# Altium PCB Layout.PcbDoc
Units mm, origin at the board's own origin, x right, y up, seen from the top; angles counter-clockwise.
Board outline 30.4 x 66 mm, 4 copper layers (Top Layer, Ground Layer, Power Layer, Bottom Layer), stack 1.591 mm thick; 36 components, 26 nets, 122 pads, 64 vias.
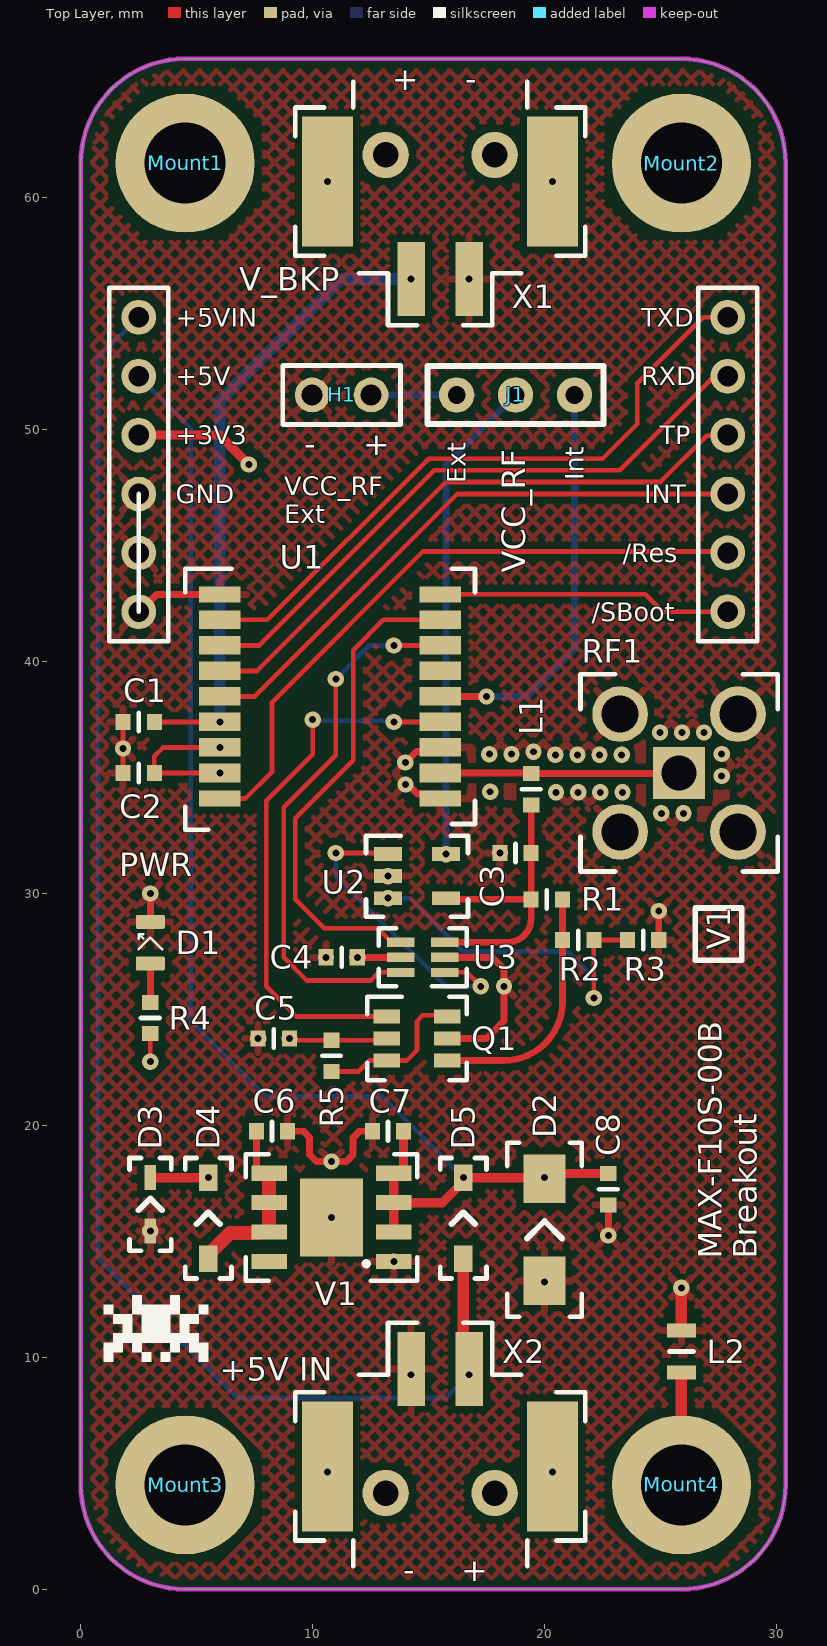
[diagram p0: Top Layer view]
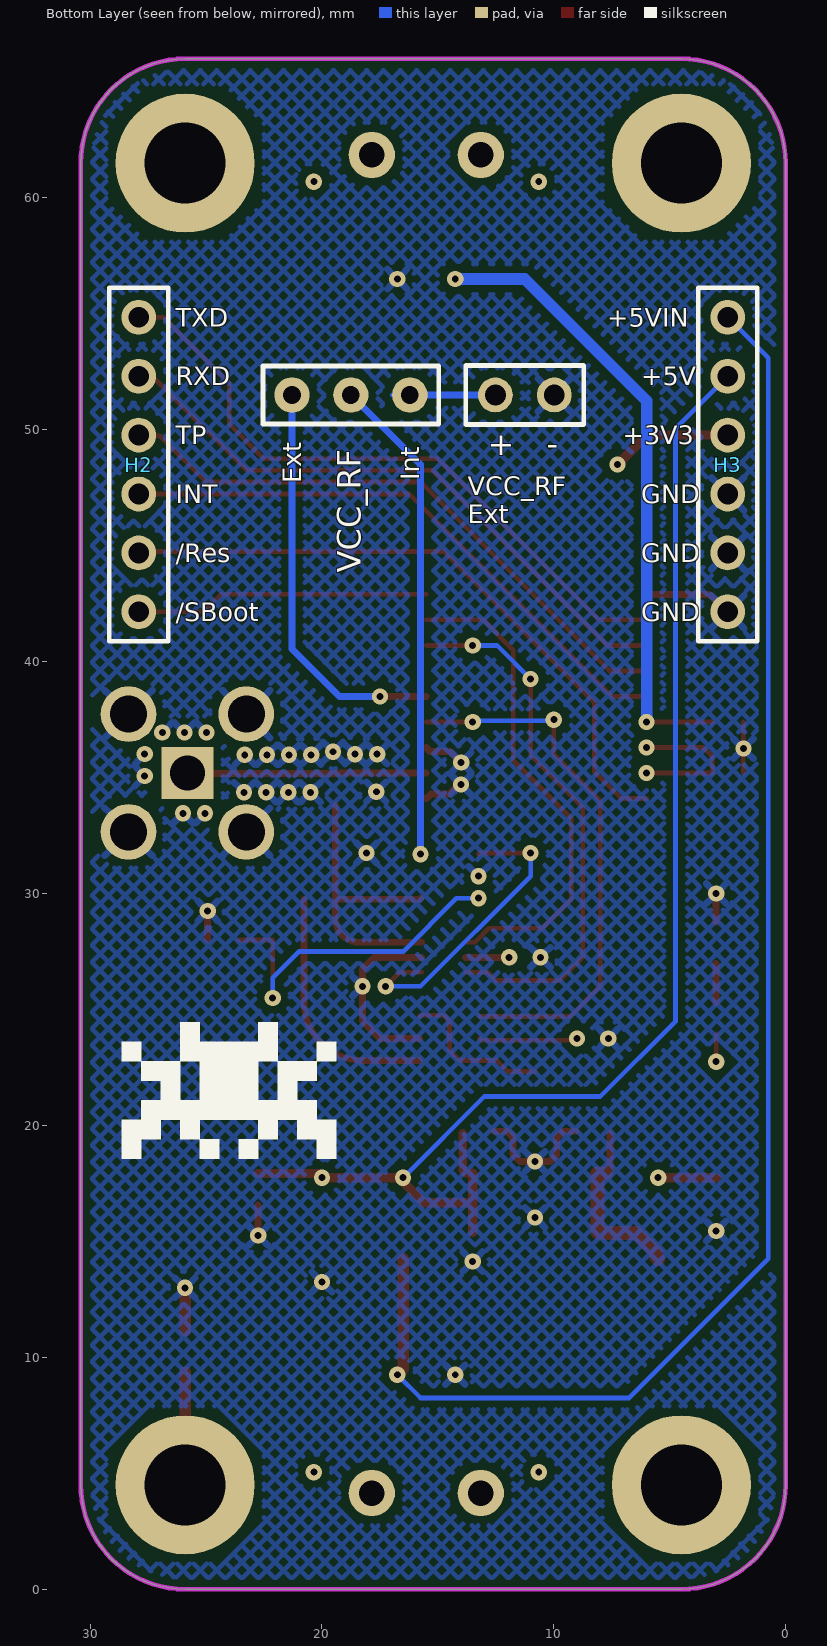
[diagram p1: Bottom Layer view, seen from below]
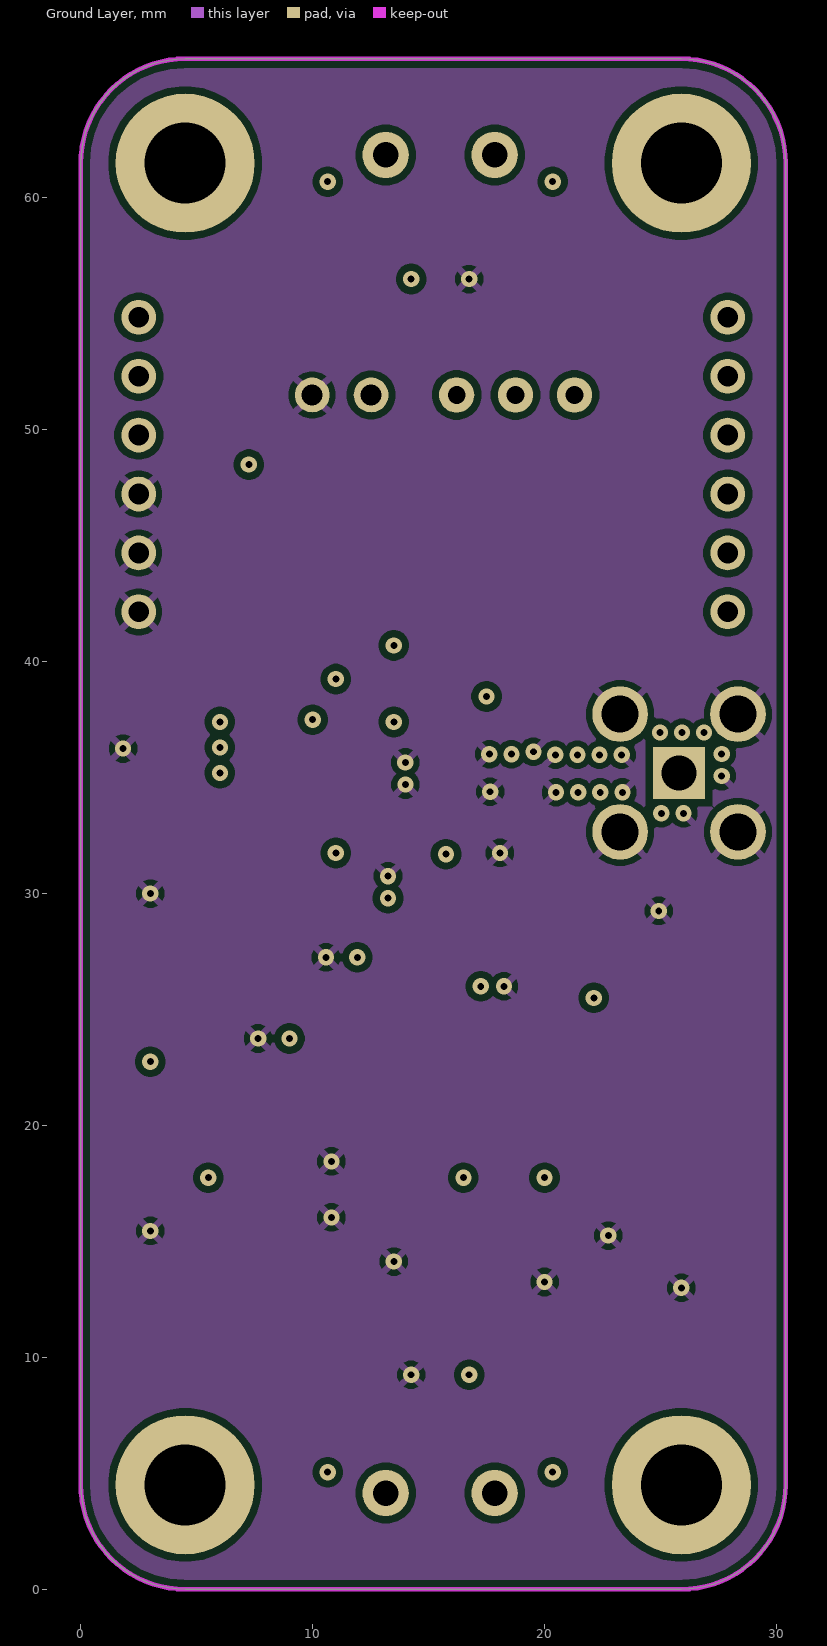
[diagram p2: Ground Layer]
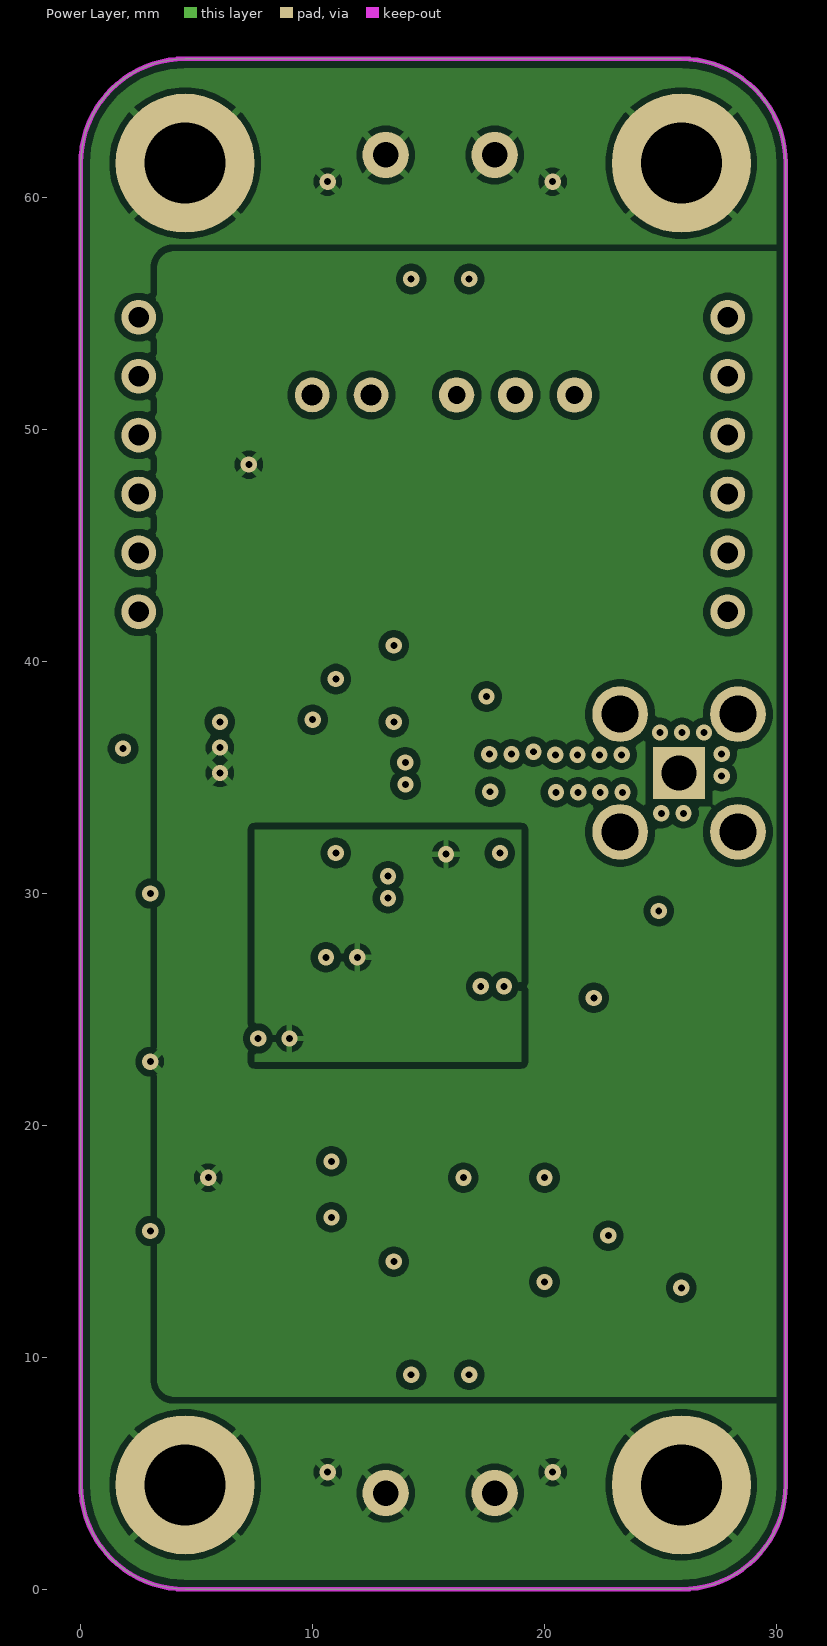
[diagram p3: Power Layer]
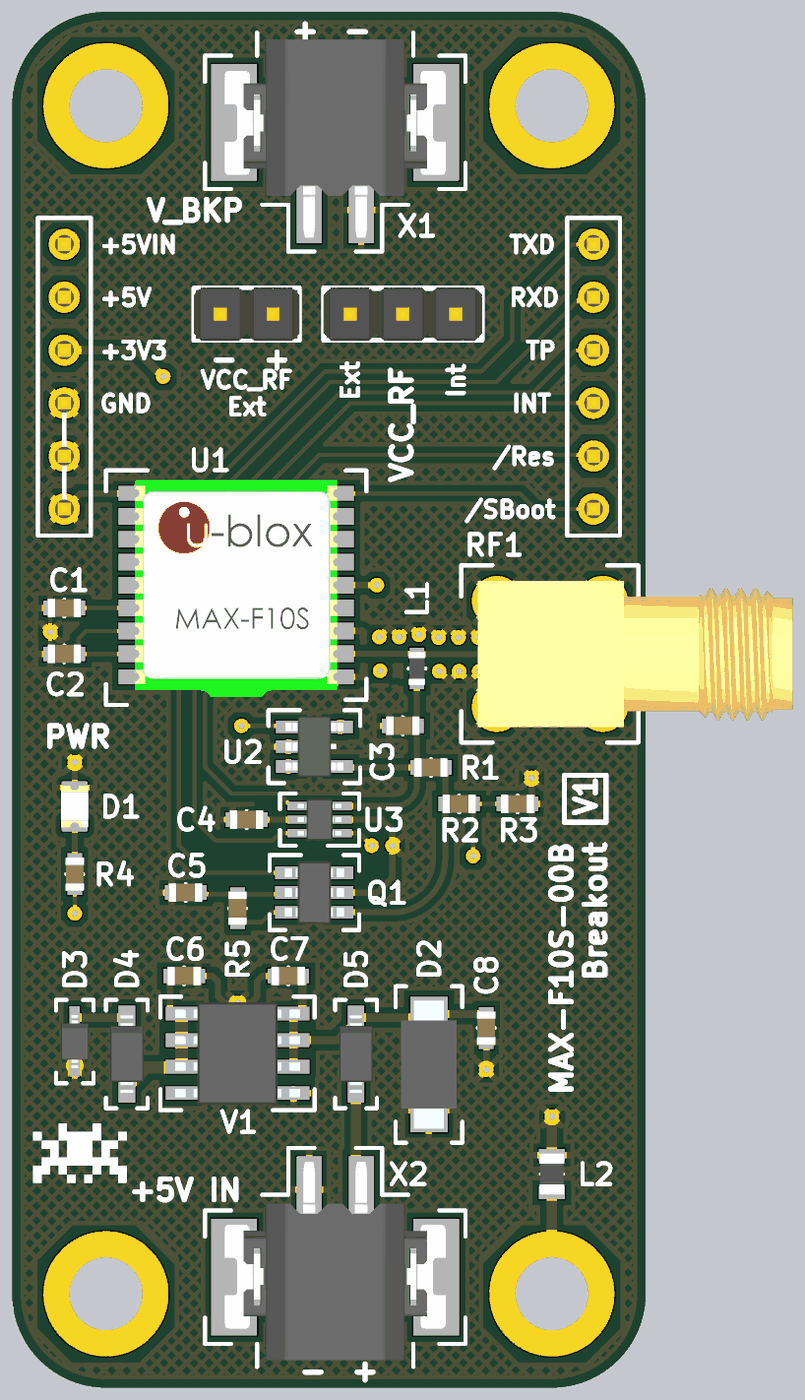
[diagram p4: 3D render of the assembled board from above, using the file's embedded part models]

## Layer stack, top to bottom
Top Solder: solder mask 0.0102, Solder Resist, Dk 3.8
Top Layer: signal copper 0.035
Dielectric 2: prepreg 0.2104, 7628*1, Dk 4.4
Ground Layer: signal copper 0.0175
Dielectric 1: dielectric 1.065, FR-4, Dk 4.8
Power Layer: signal copper 0.0175
Dielectric 3: prepreg 0.2104, 7628*1, Dk 4.4
Bottom Layer: signal copper 0.035
Bottom Solder: solder mask 0.0102, Solder Resist, Dk 3.8

## Board outline
0,4.5 0,61.5 cw(c4.5,61.5) 4.5,66 25.9,66 cw(c25.9,61.5) 30.4,61.5 30.4,4.5 cw(c25.9,4.5) 25.9,0 4.5,0 cw(c4.5,4.5)

## Design rules (kind name [scope] priority, off if disabled: settings)
BoardOutlineClearance [All] p1: gap=0.2 ignorepadtopadclearanceinfootprint=FALSE
Clearance "inPolygon Clearance" [InPolygon] p1: gap=0.3 ignorepadtopadclearanceinfootprint=TRUE // this rule ensures that every net within a polygon of a different net has a set clearance from the poly
Clearance "High Current Polygon Clearance" [(InPolygon AND InNetClass('High_Current_Nets'))] p2: gap=0 ignorepadtopadclearanceinfootprint=TRUE // this rule ensures that every net within a polygon of a different net has a set clearance from the poly
Clearance "Different Diff Pair" [All] p3: gap=0.2 ignorepadtopadclearanceinfootprint=TRUE
Clearance "Same Diff Pair" [All] p4: gap=0.1 ignorepadtopadclearanceinfootprint=TRUE
Clearance "Different Nets" [not InAnyDifferentialPair] p5: gap=0.3 ignorepadtopadclearanceinfootprint=TRUE except(0.1: Arc-SMDPad Arc-THPad Arc-Via Arc-Text Track-SMDPad Track-THPad Track-Via Track-Text SMDPad-Text THPad-Text Via-Text Fill-Text Poly-Text Region-Text Text-Text; 0.12: Arc-Arc Arc-Track Track-Track; 0.15: SMDPad-SMDPad SMDPad-THPad SMDPad-Via THPad-THPad THPad-Via Via-Via; 0.2: Arc-Hole Track-Hole SMDPad-Hole THPad-Hole Via-Hole Fill-Hole Poly-Hole Region-Hole Text-Hole)
Clearance "Same Net" [not InAnyDifferentialPair] p6: gap=0 ignorepadtopadclearanceinfootprint=TRUE except(0.1: THPad-Via; 0.18: Arc-Arc Arc-Track Track-Track)
ComponentClearance [All] p1: gap=0.102 collisioncheckmode=3 verticalgap=0.102 showdistances=TRUE
DiffPairsRouting "Ethernet Routing" [InDifferentialPairClass('Ethernet_Pairs')] p1: maxlimit=0.25 minlimit=0.2 mostfreqgap=0.25 toplayer_maxgap=0.2 toplayer_prefgap=0.2 toplayer_minwidth=0.25 toplayer_maxwidth=0.25 toplayer_prefwidth=0.25 midlayer1_mingap=0.25 midlayer1_minwidth=0.19 midlayer1_maxwidth=0.19 midlayer1_prefwidth=0.19 midlayer2_mingap=0.25 midlayer2_minwidth=0.19 midlayer2_maxwidth=0.19 midlayer2_prefwidth=0.19 bottomlayer_maxgap=0.2 bottomlayer_prefgap=0.2 bottomlayer_minwidth=0.25 bottomlayer_maxwidth=0.25 bottomlayer_prefwidth=0.25 impedanceprofiledriven=TRUE maxuncoupledlength=12.7
DiffPairsRouting "USB Routing" [InDifferentialPairClass('USB_Pairs')] p2: maxlimit=0.291 minlimit=0.127 mostfreqgap=0.291 toplayer_maxgap=0.127 toplayer_prefgap=0.127 toplayer_minwidth=0.23 toplayer_maxwidth=0.23 toplayer_prefwidth=0.23 midlayer1_mingap=0.291 midlayer1_minwidth=0.25 midlayer1_maxwidth=0.25 midlayer1_prefwidth=0.25 midlayer2_mingap=0.291 midlayer2_minwidth=0.25 midlayer2_maxwidth=0.25 midlayer2_prefwidth=0.25 bottomlayer_maxgap=0.127 bottomlayer_prefgap=0.127 bottomlayer_minwidth=0.23 bottomlayer_maxwidth=0.23 bottomlayer_prefwidth=0.23 maxuncoupledlength=12.7
DiffPairsRouting "CAN Routing" [InDifferentialPairClass('CAN_Pairs')] p3: maxlimit=0.907 minlimit=0.5 mostfreqgap=0.907 toplayer_maxgap=0.5 toplayer_prefgap=0.5 toplayer_minwidth=0.201 toplayer_maxwidth=0.201 toplayer_prefwidth=0.201 midlayer1_mingap=0.907 midlayer1_minwidth=0.155 midlayer1_maxwidth=0.155 midlayer1_prefwidth=0.155 midlayer2_mingap=0.907 midlayer2_minwidth=0.155 midlayer2_maxwidth=0.155 midlayer2_prefwidth=0.155 bottomlayer_maxgap=0.5 bottomlayer_prefgap=0.5 bottomlayer_minwidth=0.201 bottomlayer_maxwidth=0.201 bottomlayer_prefwidth=0.201 impedanceprofiledriven=TRUE maxuncoupledlength=12.7
Height [All] p1: minheight=0 maxheight=1816.048 prefheight=12.7
HoleSize [All] p1: absolutevalues=TRUE maxlimit=6.3 minlimit=0.3 maxpercent=80.000 minpercent=20.000
HoleToHoleClearance [All] p1: gap=0.25 allowstackedmicrovias=FALSE
MatchedLengths "XTAL Nets Matched Delays" [InNetClass('XTAL_Nets')] p1: tolerance=25.4 checknetsindiffpair=FALSE checkdiffpairvsdiffpair=TRUE checkxsignals=TRUE checkothers=TRUE usedelayunits=TRUE delaytolerance=10.000000
MatchedLengths "Diff Pair Matched Delays" [InDifferentialPairClass('Ethernet_Pairs') or InDifferentialPairClass('USB_Pairs') or InDifferentialPairClass('CAN_Pairs')] p2: tolerance=5 checknetsindiffpair=TRUE checkdiffpairvsdiffpair=FALSE checkxsignals=FALSE checkothers=FALSE usedelayunits=TRUE delaytolerance=100.000000 phasematching=TRUE phasedelaytolerance=5.000000 phasedistance=12.7
MinimumAnnularRing [All] p1: minimumring=0.2
MinimumSolderMaskSliver [All] p1: minsoldermaskwidth=0
PlaneClearance "Supply Net Clearance" [InNetClass('Supply_Nets')] p1: clearance=0.5
PlaneClearance "All Nets" [All] p2: clearance=0.3
PolygonConnect "High Current" [InNetClass('High_Current_Nets')] p1: thpad.connectstyle=Relief thpad.reliefconductorwidth=0.4 thpad.reliefentries=4 thpad.polygonreliefangle="90 Angle" thpad.airgapwidth=0.1 thpad.conductorbypadedge=TRUE thpad.mindistance=0.381 thpad.enablemindistance=FALSE smdpad.connectstyle=Direct smdpad.reliefconductorwidth=0.254 smdpad.reliefentries=4 smdpad.polygonreliefangle="90 Angle" smdpad.airgapwidth=0.254 via.connectstyle=Direct via.reliefconductorwidth=0.254 via.reliefentries=4 via.polygonreliefangle="90 Angle" via.airgapwidth=0.254
PolygonConnect "Supply Nets" [InNetClass('Supply_Nets')] p2: connectstyle=Relief reliefconductorwidth=0.3 reliefentries=4 polygonreliefangle="90 Angle" conductorbypadedge=TRUE mindistance=0.381 enablemindistance=FALSE airgapwidth=0.254
PolygonConnect General [All] p3: connectstyle=Relief reliefconductorwidth=0.254 reliefentries=4 polygonreliefangle="90 Angle" airgapwidth=0.254
RoutingVias [All] p1: holewidth=0.2 width=0.35 viastyle="Through Hole" minholewidth=0.15 minwidth=0.3 maxholewidth=6.3 maxwidth=6.55
SilkToSilkClearance [All] p1: silktosilkclearance=0
SilkToSolderMaskClearance [All] p1: minsilkscreentomaskgap=0 clearancetoexposedcopper=TRUE
SolderMaskExpansion [All] p1: expansion=0.075 istentingtop=FALSE
SupplyNets "Schematic Supply Nets_6" [InNet('+5V_IN')] p1: voltage=0.000
SupplyNets "Schematic Supply Nets_5" [InNet('+3V3')] p2: voltage=0.000
SupplyNets "Schematic Supply Nets_4" [InNet('RF_IN')] p3: voltage=0.000
SupplyNets "Schematic Supply Nets_2" [InNet('+5V')] p4: voltage=0.000
SupplyNets "Schematic Supply Nets" [InNet('VCC_RF')] p5: voltage=0.000
SupplyNets "Schematic Supply Nets_3" [InNet('GND')] p6: voltage=0.000
SupplyNets "Schematic Supply Nets_1" [InNet('Earth')] p7: voltage=0.000
UnRoutedNet [All] p1: checkbadconnections=TRUE
Width "nRF Width" [InNetClass('nRF Signal')] p1: maxlimit=0.286 minlimit=0.171 preferedwidth=0.286 toplayer_minwidth=0.286 midlayer1_maxwidth=0.171 midlayer1_prefwidth=0.171 midlayer2_maxwidth=0.171 midlayer2_prefwidth=0.171 bottomlayer_minwidth=0.286 impedanceprofiledriven=TRUE impedanceprofileid={6C787CD7-8D92-4465-8A2E-18DFF36EB818} impedanceprofilevalue=50.000000 minimp=50.000000 maximp=50.000000 favimp=50.000000 checkconnectedcopper=TRUE
Width [All] p2: maxlimit=100 minlimit=0.1 preferedwidth=0.2
20 further rules are at their usual default settings.

## Classes and differential pairs
net class "nRF Signal": NetC3_2 NetQ1_4 RF_IN
net class Supply_Nets: +3V3 +5V +5V_IN Earth GND NetC6_2
component class Power: C6 C7 C8 D1 D2 D3 D4 D5 R4 V1
component class Main: C1 C2 J1 U1
component class Connections: H1 H2 H3 L2 Mount1 Mount2 Mount3 Mount4 RF1 X1 X2
component class "Antenna Supervisory Circuit": C3 C4 C5 L1 Q1 R1 R2 R3 R5 U2 U3

## Components (designator, comment, footprint, x,y, rotation, side; value= is the part's Value field where it differs from the comment)
C1 "[Cap] 0603 0.1uF 10% 50V" "[Cap] SMD 0603" 2.5,37.4 r0 top (schematic designator C8)
C2 "[Cap] 0603 0.1uF 10% 50V" "[Cap] SMD 0603" 2.5,35.2 r0 top (schematic designator C7)
C3 "[Cap] 0603 0.01uF 10% 50V" "[Cap] SMD 0603" 18.75,31.75 r0 top (schematic designator C1)
C4 "[Cap] 0603 0.1uF 10% 50V" "[Cap] SMD 0603" 11.25,27.25 r0 top (schematic designator C2)
C5 "[Cap] 0603 0.1uF 10% 50V" "[Cap] SMD 0603" 8.325,23.75 r0 top (schematic designator C3)
C6 "[Cap] 0603 10uF 10% 10V" "[Cap] SMD 0603" 8.25,19.75 r180 top
C7 "[Cap] 0603 10uF 10% 10V" "[Cap] SMD 0603" 13.25,19.75 r0 top (schematic designator C5)
C8 "[Cap] 0603 0.1uF 10% 50V" "[Cap] SMD 0603" 22.75,17.25 r90 top (schematic designator C4)
D1 "[LED] SMD 0805 Green" "[LED] SMD 0805" 3,27.882 r90 top (schematic designator D5)
D2 "DO-214AC" "[Diode] SMD DO-214AC" 20,15.5 r90 top
D3 "SOD-323" "[Diode] SOD-323" 3,16.6 r90 top (schematic designator D4)
D4 "SOD123" "[Diode] SMD SOD-123" 5.5,16 r90 top (schematic designator D3)
D5 "SOD123" "[Diode] SMD SOD-123" 16.5,16 r90 top (schematic designator D1)
H1 "1x2 Header" "[Header] 1x2 Male" 11.25,51.5 r180 top
H2 "1x6 Header" "[Header] 1x6 Male" 27.9,48.5 r270 bottom (schematic designator H5)
H3 "1x6 Header" "[Header] 1x6 Male" 2.5,48.5 r270 bottom (schematic designator H4)
J1 "[Jumper] Thru-Hole 3pin" "[Jumper] Thru-Hole 3pin" 18.75,51.5 r180 top
L1 "[47nH] SMD 0603 90mA" "[Inductor] SMD 0603" 19.425,34.5 r270 top
L2 "652-MH2029-300Y" "[Ferrite] SMD 0805" 25.9,10.25 r90 top
Mount1 "M3 Mount Hole" "[Mount] M3 Mount Hole" 4.5,61.5 r0 top
Mount2 "M3 Mount Hole" "[Mount] M3 Mount Hole" 25.9,61.5 r0 top
Mount3 "M3 Mount Hole" "[Mount] M3 Mount Hole" 4.5,4.5 r0 top
Mount4 "M3 Mount Hole" "[Mount] M3 Mount Hole" 25.9,4.5 r0 top
Q1 "N/PMOS" SOT-26 14.5,23.75 r0 top
R1 "[10] SMD 0603 5% 1/10W" "[Res] SMD 0603" 20.1,29.75 r180 top
R2 "[560] SMD 0603 5% 1/10W" "[Res] SMD 0603" 21.45,28 r180 top (schematic designator R3)
R3 "[100k] SMD 0603 1% 1/10W" "[Res] SMD 0603" 24.25,28 r180 top (schematic designator R4)
R4 "[220] SMD 0603 5% 1/10W" "[Res] SMD 0603" 3,24.632 r90 top (schematic designator R5)
R5 "[100k] SMD 0603 1% 1/10W" "[Res] SMD 0603" 10.812,23 r270 top (schematic designator R2)
RF1 "[SMA] 90deg Thru-Hole" "[SMA] 90deg Thru-Hole" 25.8,35.2 r180 top
U1 "Dual-Band GNSS Module" "[GNSS] MAX-F10S-00B" 10.75,38.5 r0 top
U2 "[Op-Amp] Rail-to-Rail Vmax=16V GBP=3kHz" "[Op-Amp] Rail-to-Rail Vmax=16V GBP=3kHz" 14.5,30.75 r0 top
U3 "[Buffer] Dual Open Drain" "[Buffer] Dual Open Drain" 14.75,27.25 r180 top
V1 "3V3 1.5A" "[Linear] 3V3 1.5A" 10.812,16.035 r180 top
X1 "[Pheonix] 2pin 2.5mm pitch" "[Pheonix] 2pin 2.5mm pitch" 15.5,56.5 r180 top (schematic designator X2)
X2 "[Pheonix] 2pin 2.5mm pitch" "[Pheonix] 2pin 2.5mm pitch" 15.5,9.5 r0 top (schematic designator X1)

## Footprints (in the part's own frame and the unit in brackets; to place one, negate y for a bottom-side part, rotate by r counter-clockwise, add the part's x,y. Pads: shape width x height; smd on the part's side, far side on the other; paste and mask are expansions set on the pad)
"[Buffer] Dual Open Drain" [mm] "NC7WZ07P6X"
  rect 1.2x0.4 smd: 1(-0.95,0.65) 2(-0.95,0) 3(-0.95,-0.65) 4(0.95,-0.65) 5(0.95,0) 6(0.95,0.65)
  silkscreen extent -1.9,-1.25 1.9,1.25, body extent -1.05,-1 1.05,1, height 1.1
"[Cap] SMD 0603" [mm]
  rect 0.65x0.7 smd: 1(-0.675,0) 2(0.675,0)
  silkscreen extent 0,-0.4 0,0.4, body extent -0.8,-0.45 0.8,0.45, height 0.8
"[Diode] SMD DO-214AC" [mm]
  rect 2.1x1.8 smd: 1(2.2,0) 2(-2.2,0)
  silkscreen extent -3.75,-1.6 3.75,1.6, body extent -3.07,-1.33 3.07,1.33, height 2.39
"[Diode] SMD SOD-123" [mm]
  rect 1.15x0.8 smd: 1(1.75,0) 2(-1.75,0)
  silkscreen extent -2.6,-1 2.6,1, body extent -1.85,-0.8 1.86,0.8, height 1.35
"[Diode] SOD-323" [mm]
  rect 1.075x0.5 smd: 1(1.15,0) 2(-1.15,0)
  silkscreen extent -2,-0.9 2,0.9, body extent -1.27,-0.65 1.27,0.65, height 1.14
"[Ferrite] SMD 0805" [mm]
  rect 0.6x1.25 smd: 1(-0.9,0) 2(0.9,0)
  silkscreen extent 0,-0.53 0,0.53, body extent -1,-0.6 1,0.6, height 1.1
"[GNSS] MAX-F10S-00B" [mm] "MAX-F10S-00B"
  rect 1.8x0.7 smd: 1(-4.75,4.4) 9(-4.75,-4.4) 10(4.75,-4.4) 18(4.75,4.4)
  rect 1.8x0.8 smd: 2(-4.75,3.3) 3(-4.75,2.2) 4(-4.75,1.1) 5(-4.75,0) 6(-4.75,-1.1) 7(-4.75,-2.2) 8(-4.75,-3.3) 11(4.75,-3.3) 12(4.75,-2.2) 13(4.75,-1.1) 14(4.75,0) 15(4.75,1.1) 16(4.75,2.2) 17(4.75,3.3)
  silkscreen extent -6.25,-5.75 6.25,5.5, body extent -4.85,-5.35 4.85,5.05, height 2.48
"[Header] 1x2 Male" [mm]
  round 1.5 hole 0.9: 1(-1.27,0) 2(1.27,0)
  silkscreen extent -2.54,-1.27 2.54,1.27, body extent -2.54,-1.27 2.54,1.27, height 9.5
"[Header] 1x6 Male" [mm]
  round 1.5 hole 0.9: 1(-6.35,0) 2(-3.81,0) 3(-1.27,0) 4(1.27,0) 5(3.81,0) 6(6.35,0)
  silkscreen extent -7.62,-1.27 7.62,1.27, body extent -7.62,-1.27 7.62,1.27, height 9.5
"[Inductor] SMD 0603" [mm]
  rect 0.65x0.7 smd: 1(-0.675,0) 2(0.675,0)
  silkscreen extent 0,-0.4 0,0.4, body extent -0.8,-0.4 0.8,0.4, height 0.95
"[Jumper] Thru-Hole 3pin" [mil]
  round 60 hole 30: 1(-100,0) 2(0,0) 3(100,0)
  silkscreen extent -149,-49 149,49, body extent -150,-50 150,50, height 374
"[LED] SMD 0805" [mm]
  rrect20% 0.6x1.25 smd: 1(-0.9,0) 2(0.9,0)
  silkscreen extent -0.28,-0.51 0.37,0.51, body extent -1,-0.65 1,0.65, height 0.8
"[Linear] 3V3 1.5A" [mm]
  rect 1.525x0.65 smd: 1(-2.688,1.905) 2(-2.688,0.635) 3(-2.688,-0.635) 4(-2.688,-1.905) 5(2.688,-1.905) 6(2.688,-0.635) 7(2.688,0.635) 8(2.688,1.905)
  rect 2.71x3.35 smd: 9(0,0)
  silkscreen extent -3.7,-2.73 3.7,2.73, body extent -3,-2.45 3,2.45, height 1.5
"[Mount] M3 Mount Hole" [mm]
  round 6 hole 3.5: 1(0,0)
"[Op-Amp] Rail-to-Rail Vmax=16V GBP=3kHz" [mm] "LT6003CS5#TRMPBF"
  rect 1.2x0.6 smd: 1(-1.25,0.95) 2(-1.25,0) 3(-1.25,-0.95) 4(1.25,-0.95) 5(1.25,0.95)
  silkscreen extent -2.2,-1.75 2.2,1.75, body extent -1.4,-1.45 1.4,1.45, height 1.2
"[Pheonix] 2pin 2.5mm pitch" [mm] "1778764"
  rect 1.2x3.2 smd: 1(-1.25,0) 2(1.25,0)
  rect 2.2x5.6 smd: MP(-4.85,-4.2) MP(4.85,-4.2)
  round 2 hole 1.1: MP(-2.35,-5.35) MP(2.35,-5.35)
  silkscreen extent -6.25,-8.5 6.25,2, body extent -5.3,-8.18 5.3,1.32, height 5
"[Res] SMD 0603" [mm]
  rect 0.65x0.7 smd: 1(-0.675,0) 2(0.675,0)
  silkscreen extent 0,-0.4 0,0.4, body extent -0.8,-0.45 0.8,0.45, height 0.8
"[SMA] 90deg Thru-Hole" [mm] "RFPC-SMA27-F"
  rect 2.25x2.25 hole 1.5: 1(0,0)
  round 2.4 hole 1.6: 2(-2.54,2.54) 2(-2.54,-2.54) 2(2.54,2.54) 2(2.54,-2.54)
  silkscreen extent -4.25,-4.25 4.25,4.25, body extent -11.65,-3.5 3.45,3.5, height 10.28
SOT-26 [mm]
  rect 1.15x0.6 smd: 1(-1.3,0.95) 2(-1.3,0) 3(-1.3,-0.95) 4(1.3,-0.95) 5(1.3,0) 6(1.3,0.95)
  silkscreen extent -2.15,-1.8 2.15,1.8, body extent -1.43,-1.5 1.43,1.5, height 1.4

## Part data
C1 C2 C4 C5 C8: "CL10B104KB8NNNC", Capacitance=100nF, Max Voltage=50V, Size Package=0603, Supplier Part Number 1=1276-1000-6-ND, Tolerance=10%, Supplier 1=DigiKey
C3: "C0603C103K5RACTU", Capacitance=10nF, Max Voltage=50V, Size Package=0603, Supplier Part Number 1=399-C0603C103K5RACTUDKR-ND, Tolerance=10%, Supplier 1=DigiKey
C6 C7: "CL10A106KP8NNNC", Capacitance=10uF, Max Voltage=10V, Size Package=0603, Supplier Part Number 1=1276-1192-6-ND, Tolerance=10%, Supplier 1=DigiKey
D1: "LG R971-KN-1-0-20-R18", Color=Green, Size Package=0805, Supplier Part Number 1=475-LGR971-KN-1CT-ND, Supplier 1=DigiKey
D2: library part "[Zener] SMD 5.6V 1W 5%", "SMAZ5V6-13-F", Optimal Zener Voltage=5.6V, Supplier Part Number 1=SMAZ5V6-FDICT-ND, Tolerance=5%, Supplier 1=DigiKey, Wattage=1W
D3: library part "[TVS] 3.3Vnom 19Vclamp_max", "CDSOD323-T03C", Optimal Zener Voltage=4V, Supplier Part Number 1=CDSOD323-T03CDKR-ND, Supplier 1=DigiKey, Wattage=350W
D4 D5: library part "[Schottky] SMD 40V 1A", "B5819W-TP", Supplier Part Number 1=B5819W-TPMSCT-ND, Supplier 1=DigiKey
H1: library part "[Header] 1x2 Male", "2.54mm pitch"
H2 H3: library part "[Header] 1x6 Male", "2.54mm pitch"
L1: "AIMC-0603-47NJ-T", Inductance=47nH, Package=0603, Supplier Part Number 1=535-11541-6-ND, Supplier 1=DigiKey
L2: library part "[Ferrite] SMD 0805 3A 30ohm", Res @ Freq="30 @ 100MHz", Size Package=0805, Supplier Part Number 1=MH2029-300YCT-ND, Supplier 1=DigiKey
Mount1 Mount2 Mount3 Mount4: library part "[Mount] M3 Mount Hole", "Place at least 4.5mm from board edge. Plated."
Q1: library part "[NMOS, PMOS] FET Array 20V 1.14A", "DMC2700UDM-7", Supplier Part Number 1=DMC2700UDM-7DKR-ND, Supplier 1=DigiKey
R1: "RC0603JR-1310RL", Resistance=10, Size Package=0603, Supplier Part Number 1=13-RC0603JR-1310RLDKR-ND, Tolerance=5%, Supplier 1=DigiKey, Wattage=1/10W
R2: "RC0603JR-07560RL", Resistance=560, Size Package=0603, Supplier Part Number 1=311-560GRDKR-ND, Tolerance=5%, Supplier 1=DigiKey, Wattage=1/10W
R3 R5: "RC0603FR-07100KL", Resistance=100k, Size Package=0603, Supplier Part Number 1=311-100KHRDKR-ND, Tolerance=1%, Supplier 1=DigiKey, Wattage=1/10W
R4: "RK73B1JTTD221J", Resistance=220, Size Package=0603, Supplier Part Number 1=2019-RK73B1JTTD221JDKR-ND, Tolerance=5%, Supplier 1=DigiKey, Wattage=1/8W
RF1: "RFPC-SMA27-F", Supplier Part Number 1=2073-RFPC-SMA27-F-ND, Supplier 1=DigiKey
U1: library part "[GNSS] MAX-F10S-00B", "MAX-F10S-00B"
U2: "LT6003CS5#TRMPBF", Supplier Part Number 1=505-LT6003CS5#TRMPBFCT-ND, Supplier 1=DigiKey
U3: "NC7WZ07P6X", Supplier Part Number 1=NC7WZ07P6XDKR-ND, Supplier 1=DigiKey
V1: library part "[Linear] SMD 3V3 1.5A", "AP7362A-33SP-13", Supplier Part Number 1=AP7362A-33SP-13DICT-ND, Supplier 1=DigiKey
X1 X2: "1778764", Supplier Part Number 1=277-2315-1-ND, Supplier 1=DigiKey

## Via types
v1: diameter 0.7, hole 0.3, Top Layer to Bottom Layer, 64 vias

## Nets (pads, with @x,y where several pads share a name; then routed paths per layer and width w, separated by ;. In a path a pad name is that pad's centre, name@x,y a point inside that pad or via, vN(x,y) a via of type N, cw(c..) or ccw(c..) an arc to the next point about the centre after c; other vN are vias at no path point)
+3V3: C2.2 D3.1 D4.1 H3.3 R4.1 U1.7 U1.8 | length 15.5
  Top Layer w0.2: v1(3,22.75) R4.1 ; v1(6,35.2) C2.2 3.175,35.925 3.55,36.3 v1(6,36.3)
  Top Layer w0.4: H3.3 5.98,49.77 v1(7.25,48.5) ; D3.1 v1(5.5,17.75)
+5V: C7.2 C8.2 D2.1 D5.1 H3.2 V1.2 V1.3 V1.4 | length 57.8
  Top Layer w0.381: V1.4 13.791,17.94 13.925,18.074 C7.2@13.925,19.65 ; v1(20,17.75) 20.175,17.925 C8.2
  Top Layer w0.4: V1.2 V1.3 ; V1.4 V1.3 ; v1(20,17.75) v1(16.5,17.75) 16.5,17.575 15.595,16.67 V1.3
  Bottom Layer w0.2: H3.2 4.75,50.06 4.75,24.5 8,21.25 13,21.25 v1(16.5,17.75)
+5V_IN: D5.2 H3.1 X2.2 | length 65
  Top Layer w0.5: X2.2@16.5,9.5 D5.2
  Bottom Layer w0.2: H3.1 0.75,53.1 0.75,14.25 6.75,8.25 15.75,8.25 v1(16.75,9.25)
\ANT_OFF: Q1.1 U1.13 | length 23.6
  Top Layer w0.2: v1(10,37.5) 10,36 8,34 8,26 9.3,24.7 Q1.1 ; v1(13.5,37.4) U1.13
  Bottom Layer w0.2: v1(10,37.5) 10.05,37.45 13.45,37.45 v1(13.5,37.4)
\ANT_Short: U1.17 U3.4 | length 21.4
  Top Layer w0.2: U3.4 13.4,27.9 12.8,28.5 10.5,28.5 9.25,29.75 9.25,33.25 11.75,35.75 11.75,40.5 13.05,41.8 U1.17
\Reset: H2.5 U1.9 | length 28.7
  Top Layer w0.2: U1.9 7.1,34.1 8.25,35.25 8.25,38.25 14.75,44.75 28.44,44.75 H2.5@28.5,44.69
\Safeboot: H2.6 U1.18 | length 13.3
  Top Layer w0.2: U1.18 24.35,42.9 25.1,42.15 H2.6@28.5,42.15
ANT_Detect: U1.16 U3.6 | length 23.6
  Top Layer w0.2: v1(11,39.25) 11,35.972 8.75,33.722 8.75,27.25 9.75,26.25 12.5,26.25 12.85,26.6 U3.6 ; v1(13.5,40.7) U1.16
  Bottom Layer w0.2: v1(11,39.25) 12.45,40.7 v1(13.5,40.7)
Earth: L2.1 Mount1.1 Mount2.1 Mount3.1 Mount4.1 X1.MP X2.MP | length 4.9
  Top Layer w0.5: Mount4.1 L2.1
  other v1: 10.65,5.05 20.35,5.05 10.65,60.7 20.35,60.7
EXTINT: H2.4 U1.5 | length 26.1
  Top Layer w0.2: U1.5 7.5,38.5 16.23,47.23 H2.4@28.5,47.23
GND: C1.1 C2.1 C3.1 C4.1 C5.1 C6.1 C7.1 C8.1 D1.2 D2.2 D3.2 H1.2 H3.4 H3.5 H3.6 L2.2 Q1.5 R3.1 RF1.2 U1.1 U1.10 U1.12 U2.2 U3.2 V1.1 V1.9 X1.1 X2.1 | length 28.5
  Top Layer w0.2: C2.1 C1.1 ; R3.1 R3.1@25,28.075
  Top Layer w0.3: H3.6 2.528,42.15 3.278,42.9 U1.1 ; D1.2 v1(3,30) ; C6.1@9.049,19.75 9.599,19.75 9.874,19.475 9.874,18.75 10.174,18.45 v1(10.812,18.45) 11.45,18.45 11.75,18.75 11.75,19.475 12.025,19.75 C7.1 ; v1(13.995,35.656) 14.47,36.131 15.331,36.131 U1.12 ; v1(14.004,34.702) 14.112,34.702 14.514,34.3 15.3,34.3 U1.10 ; U3.2 17.75,27.25 18.25,26.75 v1(18.25,26) 18.25,24.5 17.5,23.75 Q1.5 ; v1(22.75,15.25) C8.1 ; R3.1 v1(24.925,29.25)
  Top Layer w0.5: L2.2 25.9,12.846 26,12.946 v1@26,13
  other v1: 14.25,9.25 25.9,13 20,13.25 13.5,14.13 3,15.45 10.812,16.035 7.65,23.75 10.575,27.25 13.25,30.75 18.075,31.75 25.036,33.459 25.99,33.459 20.495,34.366 21.449,34.366 22.403,34.366 23.357,34.366 17.655,34.391 27.641,35.065 20.465,35.984 21.419,35.984 22.373,35.984 23.327,35.984 17.618,36.009 18.572,36.009 27.641,36.019 19.52,36.116 1.825,36.25 24.974,36.941 25.928,36.941 26.882,36.941 16.75,56.5
NetC3_2: C3.2 L1.2 R1.2 U2.4 U3.3 | length 12.9
  Top Layer w0.286: U3.3 18.4,27.9 ccw(c18.4,28.925) 19.425,28.925 R1.2 ; U2.4 ccw(c15.8,29.8) 15.8,29.75 R1.2 ; L1.2 C3.2 R1.2
NetC6_2: C6.2 D4.2 V1.5 V1.6 V1.7 | length 7.8
  Top Layer w0.3: C6.2@7.575,19.65 7.575,18.115 V1.5@7.75,17.94
  Top Layer w0.6: D4.2 5.6,14.35 5.6,14.525 6.433,15.358 7.644,15.358 7.661,15.375 V1.7@8.082,15.375 ; V1.5@7.75,17.94 V1.5 V1.6 V1.7
NetD1_1: D1.1 R4.2 | length 1.7
  Top Layer w0.3: R4.2 D1.1
NetQ1_4: Q1.4 R1.1 R2.2 | length 10.8
  Top Layer w0.286: Q1.4 18.235,22.8 ccw(c18.235,25.34) 20.775,25.34 R2.2 R1.1
NetR2_1: R2.1 R3.2 U2.3 | length 15.1
  Top Layer w0.2: v1(22.125,25.5) R2.1 R3.2
  Bottom Layer w0.2: v1(13.25,29.8) 14.2,29.8 16.5,27.5 21,27.5 22.125,26.375 v1(22.125,25.5)
NetU2_1: U2.1 U3.1 | length 13.3
  Top Layer w0.2: v1(11,31.75) 13.2,31.75 U2.1 ; U3.1 16.65,26.6 v1(17.25,26)
  Bottom Layer w0.2: v1(11,31.75) 11,30.75 15.75,26 v1(17.25,26)
PMOS_Gate: Q1.3 Q1.6 R5.2 | length 6.7
  Top Layer w0.2: R5.2 11.975,22.325 12.45,22.8 Q1.3 14.05,22.8 14.5,23.25 14.5,24.5 14.75,24.75 15.75,24.75 Q1.6
RF_IN: L1.1 RF1.1 U1.11 | length 10.4
  Top Layer w0.286: U1.11 19.4,35.2 cw(c19.4,35.175) L1.1 25.875,35.175 ccw(c25.875,35.2) RF1.1@25.9,35.2
RXD: H2.2 U1.3 | length 27.3
  Top Layer w0.2: U1.3 7.7,40.7 15.25,48.25 23.25,48.25 27.25,52.25 H2.2@28.5,52.25
TIMEPULSE: H2.3 U1.4 | length 26.7
  Top Layer w0.2: U1.4 7.6,39.6 15.75,47.75 25,47.75 27,49.75 H2.3@28.5,49.75
TXD: H2.1 U1.2 | length 28.9
  Top Layer w0.2: U1.2 8.05,41.8 15,48.75 22.5,48.75 24,50.25 24,52 26.85,54.85 H2.1@28.5,54.85
V_Backup: C1.2 U1.6 X1.2 | length 27.1
  Top Layer w0.2: C1.2 v1(6,37.4)
  Bottom Layer w0.5: v1(6,37.4) 6,51.25 11.25,56.5 v1@14.201,56.5
  other v1: 14.25,56.5
VCC_RF: C4.2 C5.2 J1.2 Q1.2 R5.1 U2.5 U3.5 | length 27.2
  Top Layer w0.2: v1(9,23.75) 9.075,23.675 13.125,23.675 Q1.2
  Top Layer w0.3: v1(11.925,27.25) U3.5
  Bottom Layer w0.3: v1(15.75,31.7) 15.75,48.5 J1.2
VCC_RF_External: H1.1 J1.3 | length 3.7
  Bottom Layer w0.3: H1.1 J1.3
VCC_RF_Internal: J1.1 U1.14 | length 17.6
  Top Layer w0.3: U1.14 v1(17.5,38.5)
  Bottom Layer w0.3: v1(17.5,38.5) 19.25,38.5 21.29,40.54 J1.1
pads on no net: U1.15 V1.8

## Polygon pours and split planes (outlines as drawn)
GND on Top Layer "Top GND Poly" (hatched 45Degree grid 0.508 track 0.203, remove dead copper, pour order 5): 0,0 0,66 30.4,66 30.4,0
GND on Top Layer "Top Layer-GND" (solid, pour order 0): 27.275,37.259 27.509,37.163 27.709,37.009 27.863,36.809 27.959,36.575 27.992,36.325 27.992,34.075 27.959,33.825 27.863,33.591 27.709,33.391 27.509,33.237 27.275,33.141 27.025,33.108 24.775,33.108 24.525,33.141 24.291,33.237 24.091,33.391 23.937,33.591 23.841,33.825 23.816,34.014 20.261,34.014 20.259,34.012 20.025,33.916 19.775,33.883 19.075,33.883 18.825,33.916 18.591,34.012 18.556,34.039 16.984,34.039 16.884,33.962 16.65,33.866 16.4,33.833 14.6,33.833 14.35,33.866 14.116,33.962 13.916,34.116 13.762,34.316 13.666,34.55 13.633,34.8 13.633,35.6 13.666,35.85 13.762,36.084 13.916,36.284 14.116,36.438 14.35,36.534 14.6,36.567 16.4,36.567 16.65,36.534 16.884,36.438 16.984,36.361 18.647,36.361 18.825,36.434 19.075,36.467 19.775,36.467 20.025,36.434 20.259,36.338 20.261,36.336 23.809,36.336 23.841,36.575 23.937,36.809 24.091,37.009 24.291,37.163 24.525,37.259 24.775,37.292 27.025,37.292
+3V3 on Power Layer "+3V3 Power Poly" (solid, remove dead copper, pour order 7): 0,0 30.4,0 30.4,66 0,66
Earth on Power Layer "Earth Power Poly" (solid, remove dead copper, pour order 6): 30.4,58 4,58 ccw(c3.999,57.001) 3,57 3,9 ccw(c4,9) 4,8 30.4,8 30.4,0 0,0 0,66 30.4,66
VCC_RF on Power Layer "VCC_RF Power Poly" (solid, remove dead copper, pour order 1): 7.5,32.75 19,32.75 19,22.75 7.5,22.75
GND on Bottom Layer "Bottom GND Poly" (hatched 45Degree grid 0.508 track 0.203, remove dead copper, pour order 4): 0,0 0,66 30.4,66 30.4,0
GND on Ground Layer "GND Poly" (solid, remove dead copper, pour order 3): 0,0 0,66 30.4,66 30.4,0

## Keep-outs
Keep-Out Layer:
  the board outline again, w0.2

## Other copper
Top Layer:
  pour cut-out: 27.122,36.559 27.204,36.504 27.259,36.422 27.279,36.325 27.279,34.075 27.259,33.978 27.204,33.896 27.122,33.841 27.025,33.821 24.775,33.821 24.678,33.841 24.596,33.896 24.541,33.978 24.521,34.075 24.521,34.728 19.993,34.728 19.954,34.671 19.872,34.616 19.775,34.596 19.075,34.596 18.978,34.616 18.896,34.671 18.841,34.753 16.644,34.753 16.634,34.703 16.579,34.621 16.497,34.566 16.4,34.546 14.6,34.546 14.503,34.566 14.421,34.621 14.366,34.703 14.346,34.8 14.346,35.6 14.366,35.697 14.421,35.779 14.503,35.834 14.6,35.854 16.4,35.854 16.497,35.834 16.579,35.779 16.634,35.697 16.644,35.647 18.874,35.647 18.896,35.679 18.978,35.734 19.075,35.754 19.775,35.754 19.872,35.734 19.954,35.679 19.993,35.622 24.521,35.622 24.521,36.325 24.541,36.422 24.596,36.504 24.678,36.559 24.775,36.579 27.025,36.579

## Silkscreen, mask and mechanical layers (free items; w line width, h text height)
Top Overlay:
  region: 2.234,12.681 2.636,12.681 2.636,12.272 3.863,12.272 3.863,12.681 4.272,12.681 4.272,11.863 3.863,11.863 3.863,11.045 4.272,11.045 4.272,11.863 5.091,11.863 5.091,11.455 5.09,11.455 5.09,11.454 4.681,11.454 4.681,11.045 5.09,11.045 5.09,11.044 5.091,11.044 5.091,10.636 5.5,10.636 5.5,9.818 5.091,9.818 5.091,10.227 4.682,10.227 4.681,10.227 4.681,10.636 4.272,10.636 4.272,10.227 3.863,10.227 3.863,10.636 2.636,10.636 2.636,10.227 2.227,10.227 2.227,10.636 1.818,10.636 1.818,10.227 1.817,10.227 1.409,10.227 1.409,9.818 1,9.818 1,10.636 1.409,10.636 1.409,11.044 1.409,11.045 1.818,11.045 1.818,11.454 1.409,11.454 1.409,11.455 1.409,11.863 2.227,11.863 2.227,11.045 2.636,11.045 2.636,11.863 2.227,11.863 2.227,12.681 2.234,12.681
  region: 5.091,11.989 5.091,12.272 5.5,12.272 5.5,11.863 5.091,11.863 5.091,11.989
  region: 3.863,10.194 3.863,9.818 3.454,9.818 3.454,10.226 3.455,10.226 3.455,10.227 3.863,10.227 3.863,10.195
  region: 2.789,9.818 2.636,9.818 2.636,10.227 3.045,10.227 3.045,10.226 3.045,9.818 2.789,9.818
  region: 1,12.158 1,12.272 1.408,12.272 1.409,12.272 1.409,11.863 1,11.863 1,12.157
  lines w0.2: 2.5,47.23 2.5,44.69 2.5,44.69 2.5,42.15
  lines w0.25: 26.5,27.125 28.5,27.125 28.5,29.375 26.5,29.375 26.5,27.125
  text "+" at 14.583,64.65 h1
  text "-" at 17.083,64.65 h1
  text "V_BKP" at 6.835,56 h1
  text "+5VIN" at 4.1,54.45 h0.8
  text "TXD" at 24.167,54.45 h0.8
  text "+5V" at 4.1,51.91 h0.8
  text "RXD" at 24.167,51.91 h0.8
  text "+3V3" at 4.1,49.37 h0.8
  text "TP" at 24.967,49.37 h0.8
  text "-" at 9.647,48.9 h1
  text "+" at 12.187,48.9 h1
  text "Int" at 21.69,47.817 h0.8 r90
  text "Ext" at 16.61,47.684 h0.8 r90
  text "GND" at 4.1,46.83 h0.8
  text "INT" at 24.3,46.83 h0.8
  text "VCC_RF / Ext" at 8.784,45.977 h0.8
  text "/Res" at 23.368,44.29 h0.8
  text "VCC_RF" at 19.167,43.835 h1 r90
  text "/SBoot" at 22.035,41.75 h0.8
  text "PWR" at 1.667,30.75 h1
  text "V1" at 28,27.584 h1 r90
  text "MAX-F10S-00B / Breakout" at 29.15,14.254 h1 r90
  text "+5V IN" at 6.002,9 h1
  text "-" at 13.917,0.35 h1
  text "+" at 16.417,0.35 h1
Bottom Overlay:
  region: 23.058,18.556 22.743,18.556 22.743,19.397 23.583,19.397 23.583,19.396 23.584,19.396 23.584,18.556 23.059,18.556
  region: 19.38,23.366 19.38,23.602 20.219,23.602 20.219,23.601 20.221,23.601 20.221,22.761 19.38,22.761 19.38,23.365
  region: 27.789,23.02 27.789,23.601 27.79,23.601 27.79,23.602 28.63,23.602 28.63,22.761 27.789,22.761 27.789,23.019
  region: 25.266,19.33 25.266,18.556 24.425,18.556 24.425,19.396 24.426,19.396 24.426,19.397 25.266,19.397 25.266,19.331
  region: 21.917,24.443 22.743,24.443 22.743,23.602 25.266,23.602 25.266,24.443 26.107,24.443 26.107,22.761 25.266,22.761 25.266,21.079 26.107,21.079 26.107,22.761 27.789,22.761 27.789,21.921 27.788,21.921 27.788,21.92 26.948,21.92 26.948,21.079 27.788,21.079 27.788,21.078 27.789,21.078 27.789,20.238 28.63,20.238 28.63,18.556 27.789,18.556 27.789,19.397 26.949,19.397 26.949,19.398 26.948,19.398 26.948,20.238 26.107,20.238 26.107,19.398 26.106,19.398 26.106,19.397 25.266,19.397 25.266,20.238 22.743,20.238 22.743,19.397 21.903,19.397 21.903,19.398 21.902,19.398 21.902,20.238 21.061,20.238 21.061,19.398 21.06,19.398 21.06,19.397 20.221,19.397 20.221,18.556 19.38,18.556 19.38,20.238 20.221,20.238 20.221,21.078 20.222,21.078 20.222,21.079 21.061,21.079 21.061,21.92 20.222,21.92 20.222,21.921 20.221,21.921 20.221,22.761 21.902,22.761 21.902,21.079 22.743,21.079 22.743,22.761 21.902,22.761 21.902,24.443 21.916,24.443
  lines w0.2: 14.96,50.25 22.54,50.25 22.54,52.75 14.96,52.75 14.96,50.25
  text "+5VIN" at 7.699,54.45 h0.8
  text "TXD" at 26.3,54.45 h0.8
  text "+5V" at 6.233,51.91 h0.8
  text "RXD" at 26.3,51.91 h0.8
  text "+3V3" at 7.032,49.37 h0.8
  text "TP" at 26.3,49.37 h0.8
  text "-" at 10.313,48.9 h1
  text "+" at 12.853,48.9 h1
  text "Int" at 15.81,47.817 h0.8 r270
  text "Ext" at 20.89,47.684 h0.8 r270
  text "GND" at 6.233,46.83 h0.8
  text "INT" at 26.3,46.83 h0.8
  text "VCC_RF / Ext" at 13.716,45.977 h0.8
  text "GND" at 6.233,44.29 h0.8
  text "/Res" at 26.3,44.29 h0.8
  text "VCC_RF" at 18.333,43.835 h1 r270
  text "GND" at 6.233,41.75 h0.8
  text "/SBoot" at 26.3,41.75 h0.8
Poly Planning:
  lines w0.1: 7.5,22.75 7.5,32.75 19,32.75 19,22.75 7.5,22.75
  lines w0.2: 3,9 ccw(c4,9) 4,8 ; 3,57 cw(c4,57) 4,58 ; 30.4,8 3,8 3,58 30.4,58